# EAGLE board Modul 1-Sistem kendali ON-OFF-Siti Redyta Cahyani-6702190024 (EAGLE 7.6.0)

Size 73.58 x 63.39 mm. Coordinates in mm from the lower left corner, seen from the top.
Outline: 0,0 56.82,0 56.82,53.33 0,53.33 0,0
Copper layers (1*16): Top 0.035mm / dielectric 1.5mm / Bottom 0.035mm
Design rules "default": minimum track width 10mil, minimum drill 24mil, track to track 8mil, track to pad 8mil, pad to pad 8mil, via to via 8mil, smd to smd 8mil, copper to edge 40mil, drill to drill 8mil, minimum pad ring 10mil, minimum via ring 8mil, stop-mask expansion 4mil, vias tented up to drill 0mil, thermal gap 10mil

## Footprints (pad centres in the part's own frame; a part is rotated, then mirrored left to right if it is on the bottom)
2P-2.54-65/35MIL = drill 0.889 pad 1.651 square: 1 0,1.27 | drill 0.889 pad 1.651: 2 0,-1.27
0207/10 = drill 0.813 octagon: 1 -5.08,0; 2 5.08,0
ARDUINO_UNO = drill 1.016 pad 1.88: 0 63.5,50.8; 1 60.96,50.8; 2 58.42,50.8; 3 55.88,50.8; 3.3V 35.56,2.54; 4 53.34,50.8; 5 50.8,50.8; 5V 38.1,2.54; 6 48.26,50.8; 7 45.72,50.8; 8 41.656,50.8; 9 39.116,50.8; 10 36.576,50.8; 11 34.036,50.8; 12 31.496,50.8; 13 28.956,50.8; A0 50.8,2.54; A1 53.34,2.54; A2 55.88,2.54; A3 58.42,2.54; A4 60.96,2.54; A5 63.5,2.54; AREF 23.876,50.8; GND 26.416,50.8; GND. 43.18,2.54; GND.. 40.64,2.54; I/OREF 30.48,2.54; N/C 27.94,2.54; RESET 33.02,2.54; SCL 18.796,50.8; SDA 21.336,50.8; VIN 45.72,2.54 | hole 3.2: 66.04,7.62; 66.04,35.56; 15.24,50.8; 13.97,2.54
DIL16 = drill 0.813 long: 1 -8.89,-3.81; 2 -6.35,-3.81; 3 -3.81,-3.81; 4 -1.27,-3.81; 5 1.27,-3.81; 6 3.81,-3.81; 7 6.35,-3.81; 8 8.89,-3.81; 9 8.89,3.81; 10 6.35,3.81; 11 3.81,3.81; 12 1.27,3.81; 13 -1.27,3.81; 14 -3.81,3.81; 15 -6.35,3.81; 16 -8.89,3.81
LED5MM = drill 0.813 octagon: A -1.27,0; K 1.27,0

## Placement (x,y rotation side)
M1  [2P-2.54-65/35MIL]  5,175.18 0 top  (outside the outline)
M2  [2P-2.54-65/35MIL]  5,200.58 0 top  (outside the outline)
R1  33k‎Ω  [0207/10]  5,98.98 0 top  (outside the outline)
R3  33k‎Ω  [0207/10]  5,111.68 0 top  (outside the outline)
R4  33k‎Ω  [0207/10]  5,124.38 0 top  (outside the outline)
R5  33k‎Ω  [0207/10]  5,137.08 0 top  (outside the outline)
R6  33k‎Ω  [0207/10]  5,149.78 0 top  (outside the outline)
R7  33k‎Ω  [0207/10]  5,162.48 0 top  (outside the outline)
U1  [ARDUINO_UNO]  5,10.08 0 top
U2  [DIL16]  5,187.88 0 top  (outside the outline)
U3  [LED5MM]  5,22.78 0 top
U4  [LED5MM]  5,35.48 0 top
U5  [LED5MM]  5,48.18 0 top
U6  [LED5MM]  5,60.88 0 top
U7  [LED5MM]  5,73.58 0 top  (outside the outline)
U8  [LED5MM]  5,86.28 0 top  (outside the outline)

## Library data of the parts
M1 M2 R1 R3-R7 U1-U8 = AUTODESK_CIRCUITS_BREADBOARD

## Nets
N$1: R7.1 U1.A0 U6.A
N$2: R6.1 U1.A1 U5.A
N$3: R5.1 U1.A2 U8.A
N$4: R1.1 U1.A4 U7.A
N$5: R4.1 U1.A3 U3.A
N$6: U1.4 U2.1
N$7: U1.5 U2.2
N$8: M1.2 U2.3
N$9: U2.4 U2.5
N$10: M1.1 U2.6
N$11: U1.6 U2.7
N$12: U1.2 U2.9
N$13: U1.3 U2.10
N$14: M2.2 U2.11
N$15: M2.1 U2.14
N$16: U1.11 U2.15
N$17: U1.5V U2.8 U2.16 U3.K U4.K U5.K U6.K U7.K U8.K
N$18: R1.2 R3.2 R4.2 R5.2 R6.2 R7.2 U1.GND.. U2.12 U2.13
N$19: R3.1 U1.A5 U4.A

## Tracks (layer width: path | path; a pad name or v marks a point on that pad's centre or on a via)
N$1  (2 unrouted)
N$2  (2 unrouted)
N$3  (2 unrouted)
N$4  (2 unrouted)
N$5  (2 unrouted)
N$6  (1 unrouted)
N$7  (1 unrouted)
N$8  (1 unrouted)
N$9  (1 unrouted)
N$10  (1 unrouted)
N$11  (1 unrouted)
N$12  (1 unrouted)
N$13  (1 unrouted)
N$14  (1 unrouted)
N$15  (1 unrouted)
N$16  (1 unrouted)
N$17  (8 unrouted)
N$18  (8 unrouted)
N$19  (2 unrouted)